# Altium PCB GEM_HV_channel.PcbDoc (part 1 of 3)
Units mm, origin at the board's own origin, x right, y up, seen from the top; angles counter-clockwise.
Board outline 124.5 x 38 mm, 4 copper layers (Top Layer, Layer 1, Layer 2, Bottom Layer), stack 1.441 mm thick; 166 components, 114 nets, 518 pads, 164 vias.
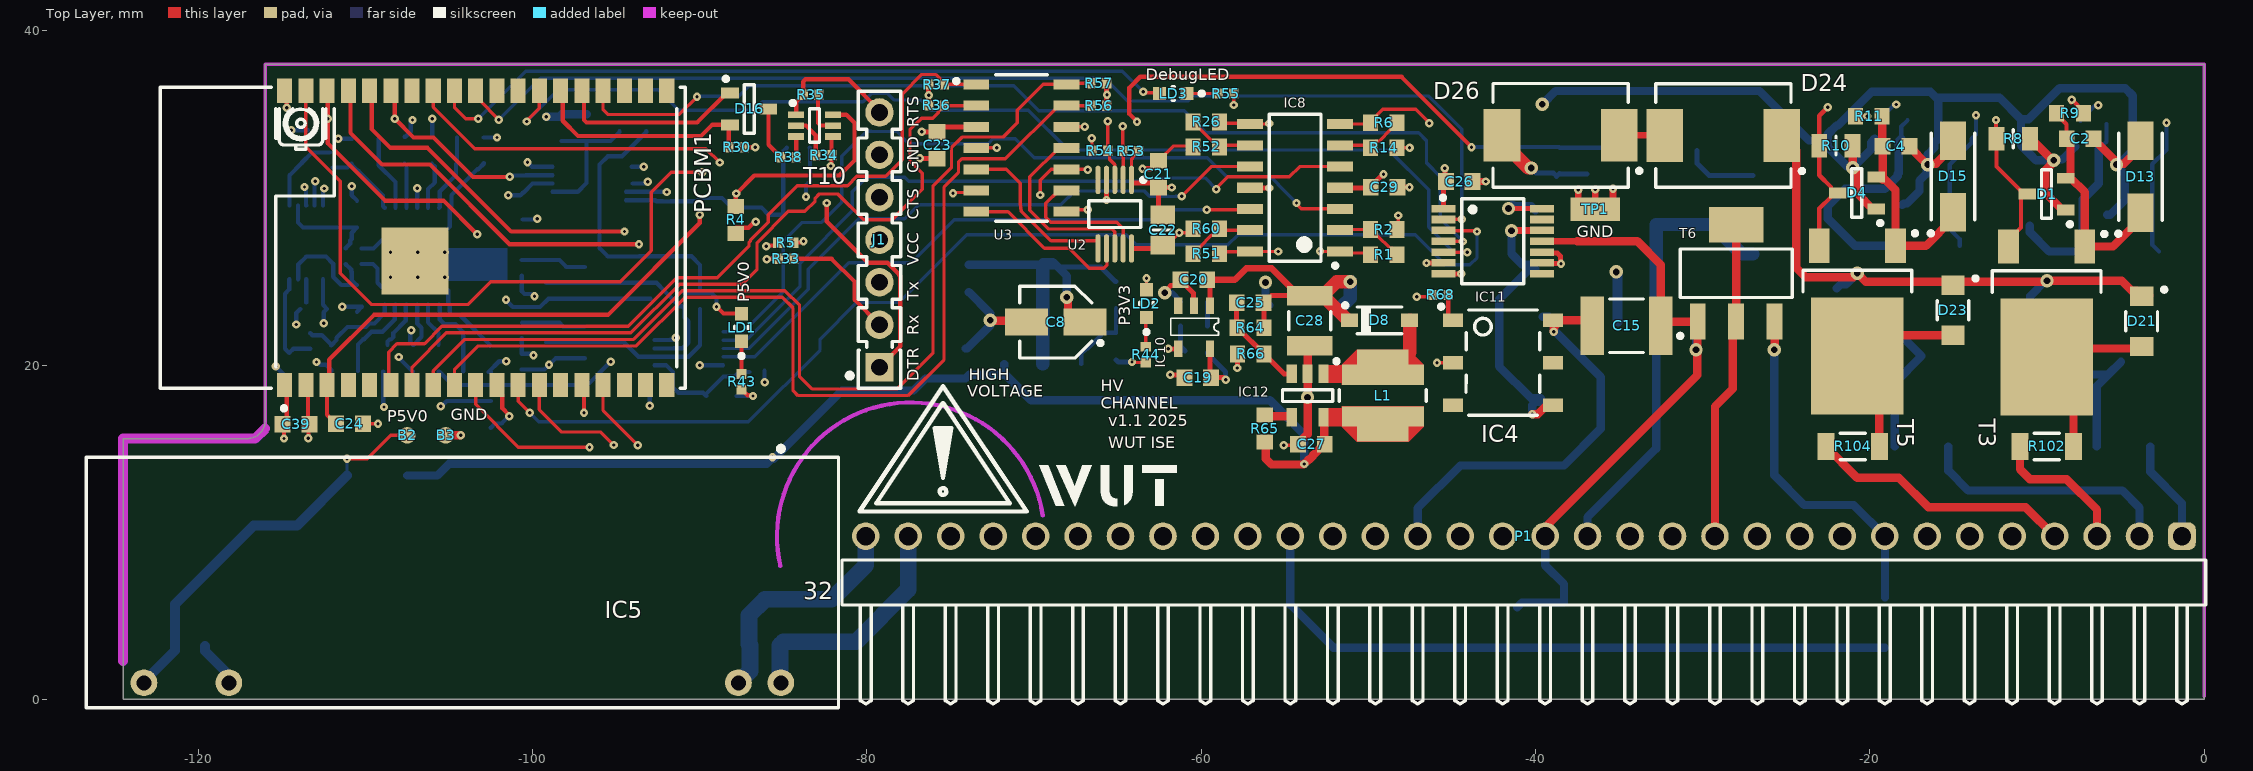
[diagram p0: Top Layer view]
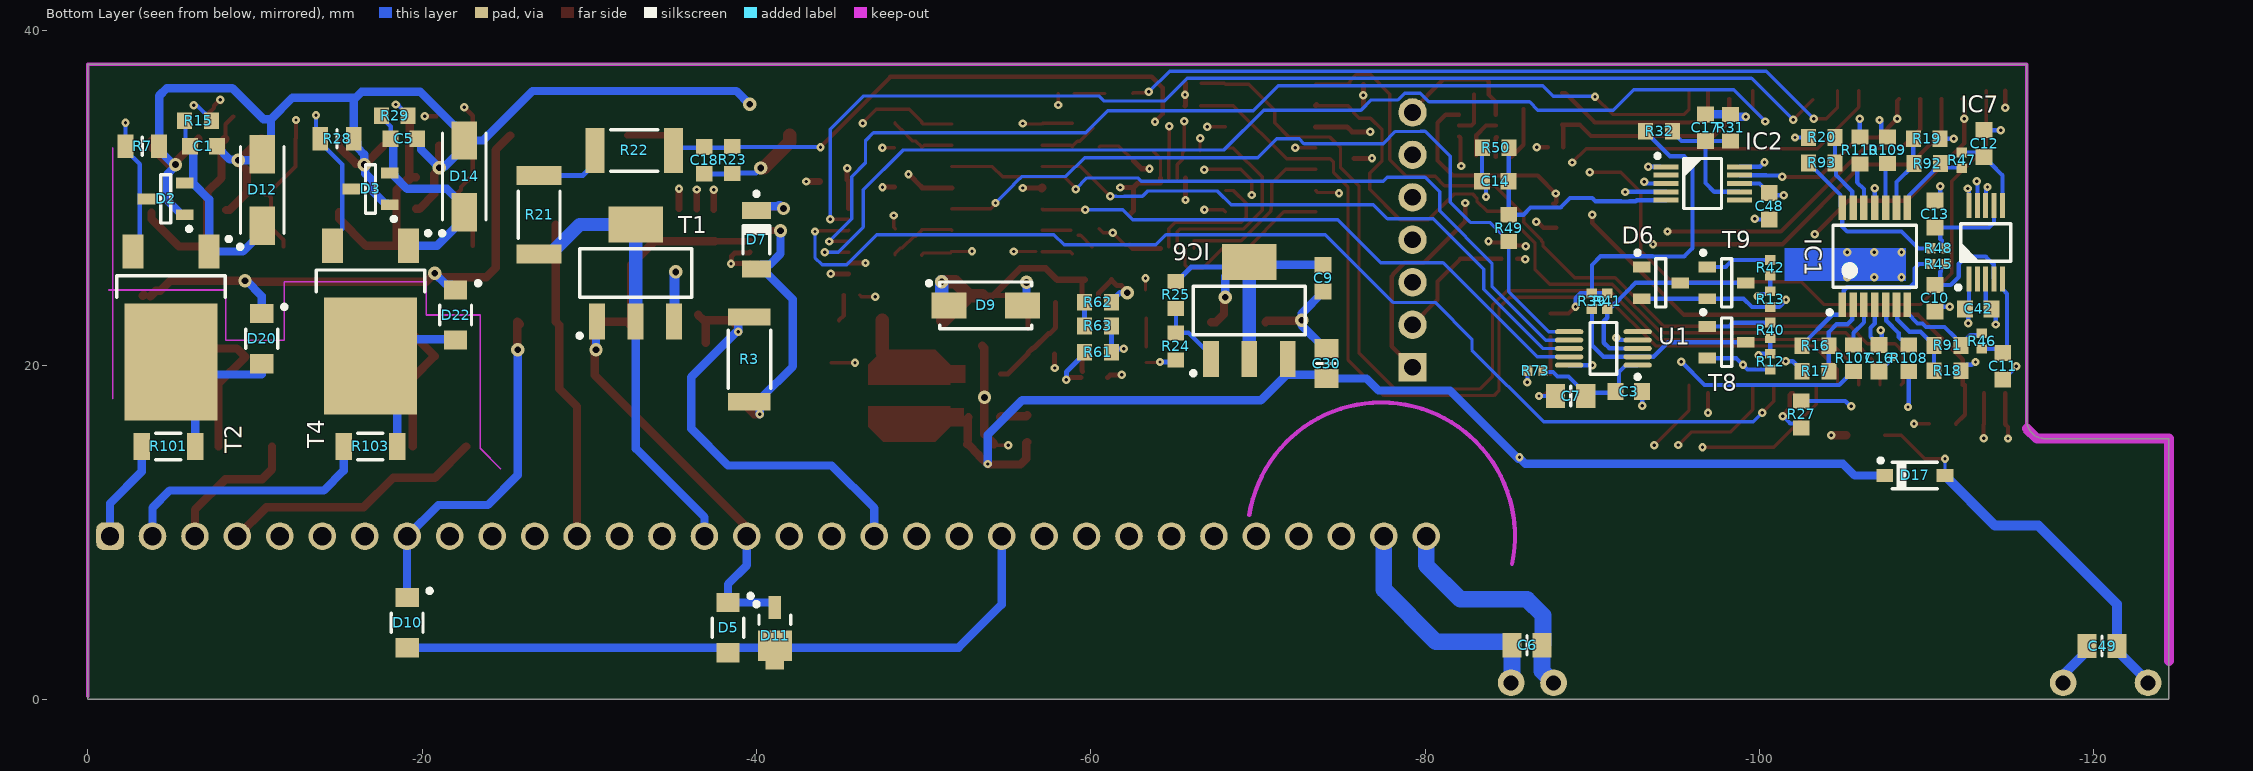
[diagram p1: Bottom Layer view, seen from below]
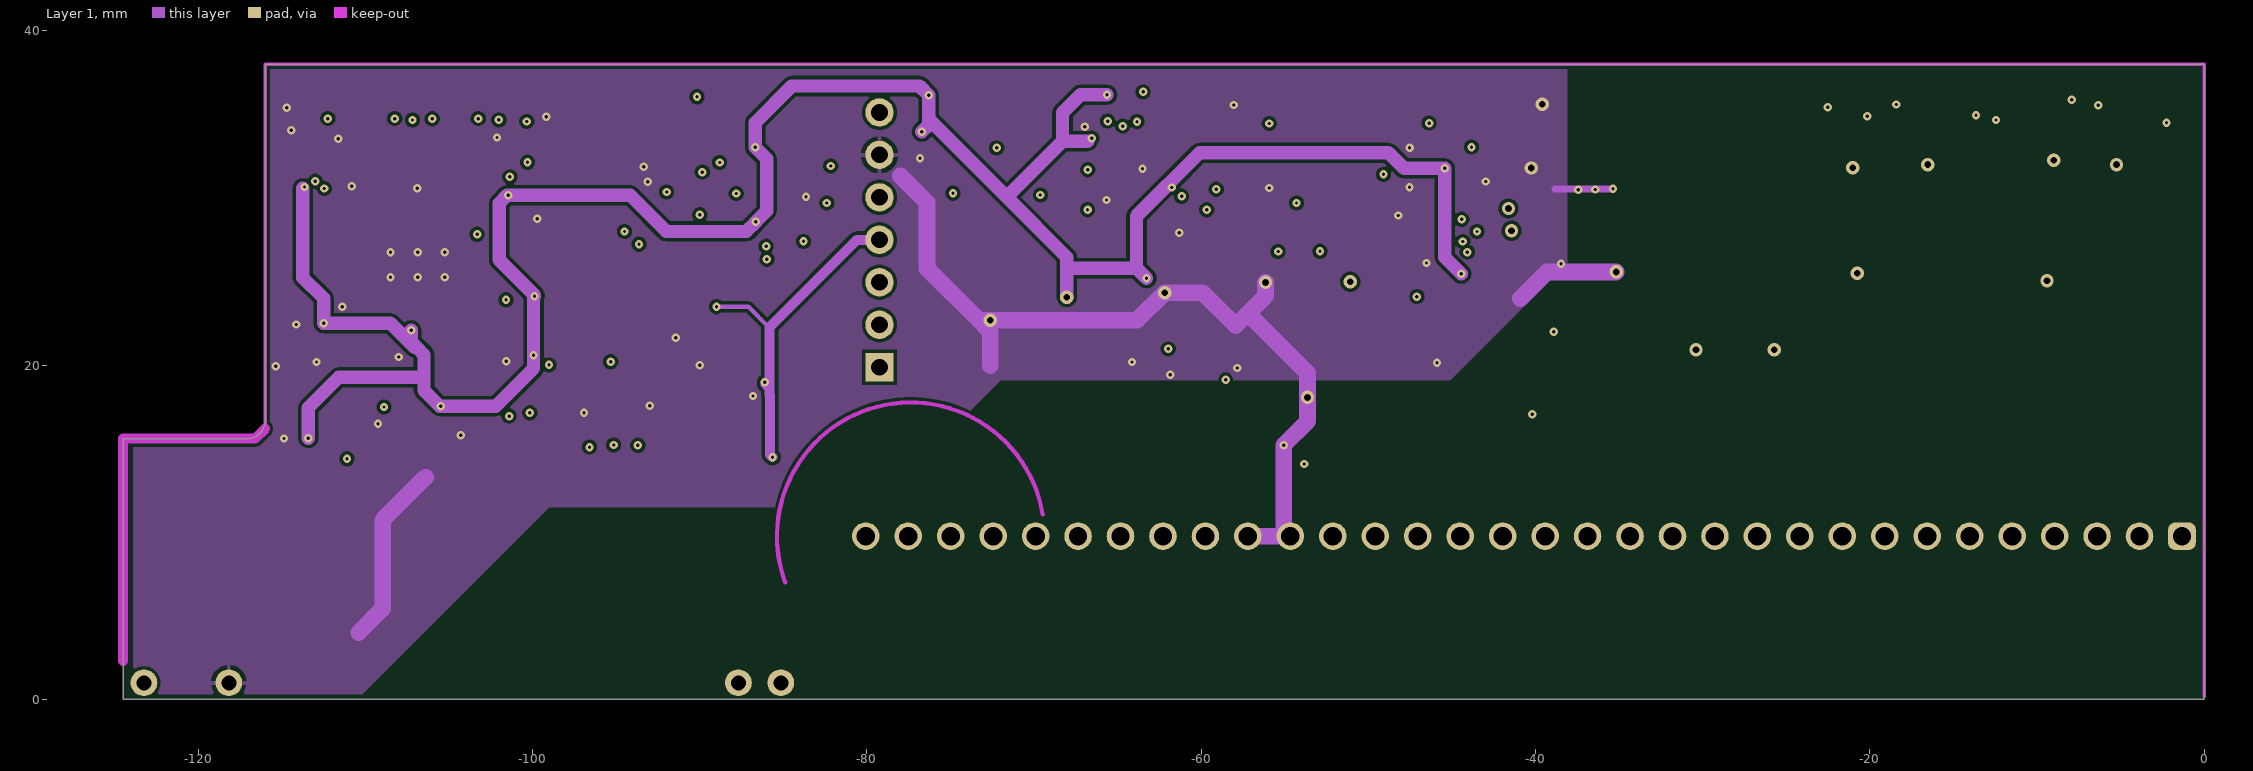
[diagram p2: Layer 1]
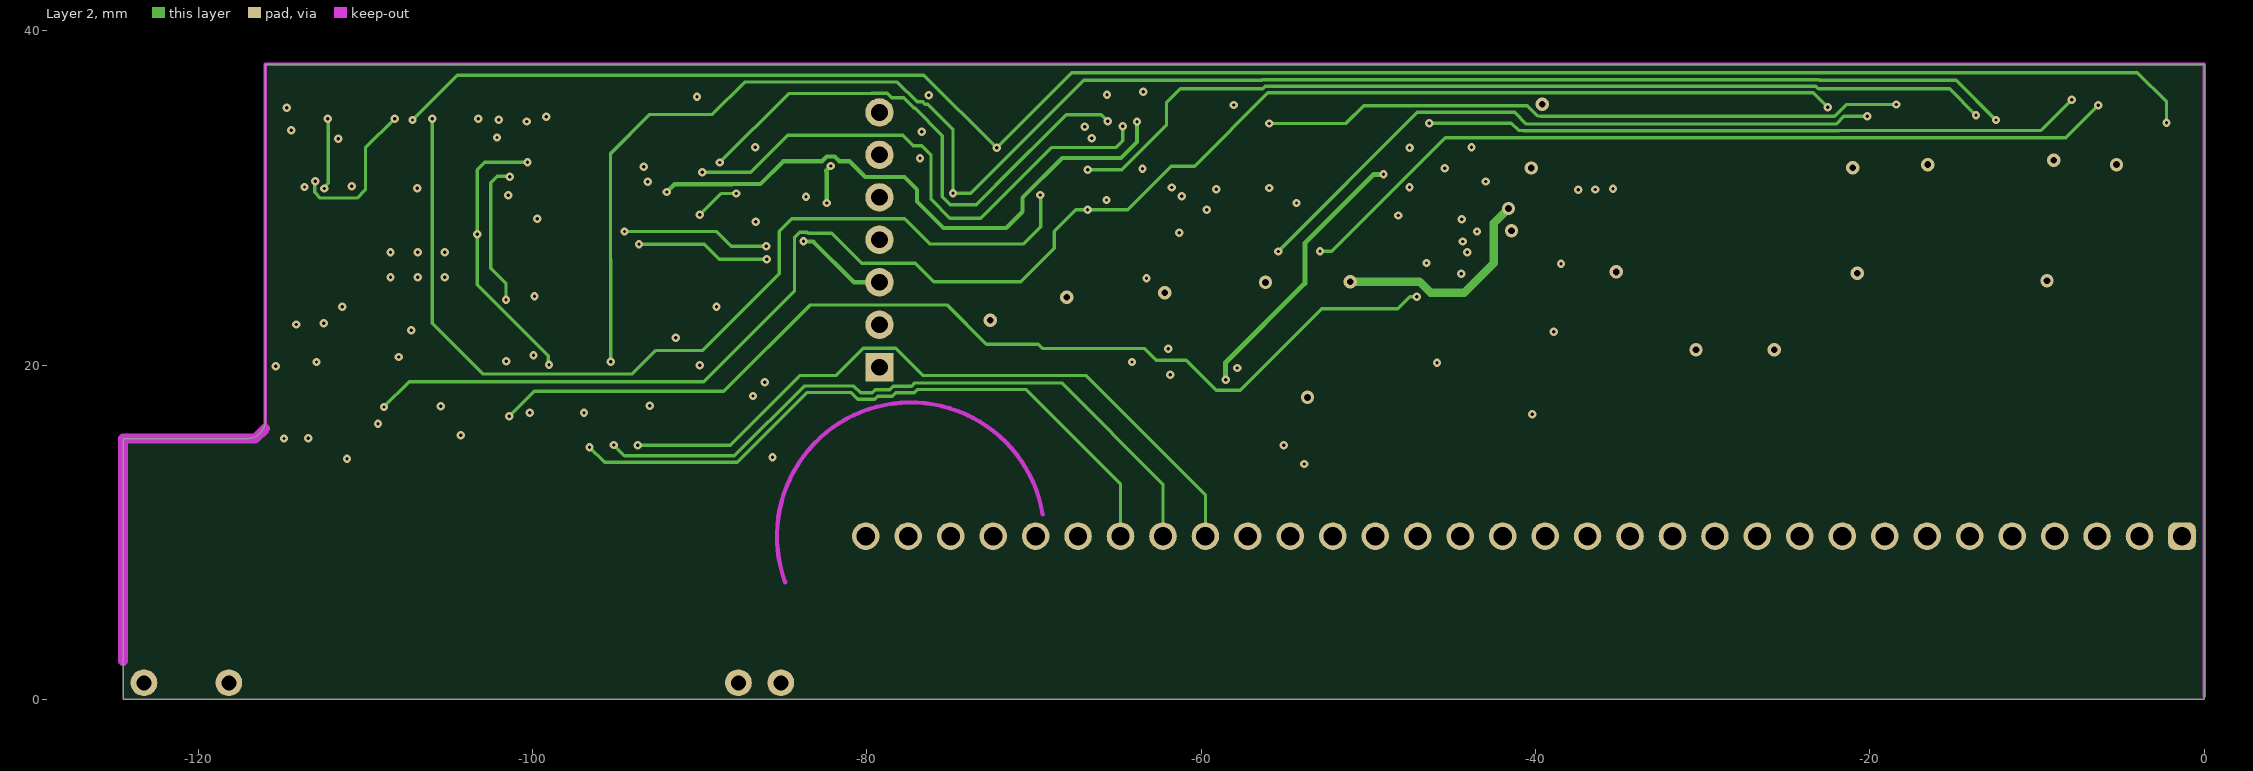
[diagram p3: Layer 2]
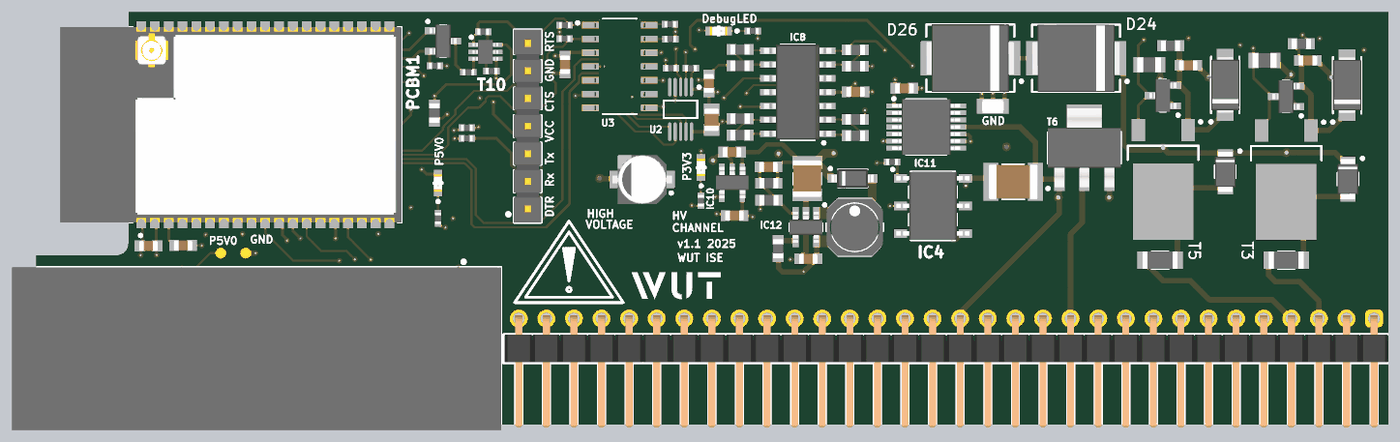
[diagram p5: 3D render of the assembled board from above, using the file's embedded part models]
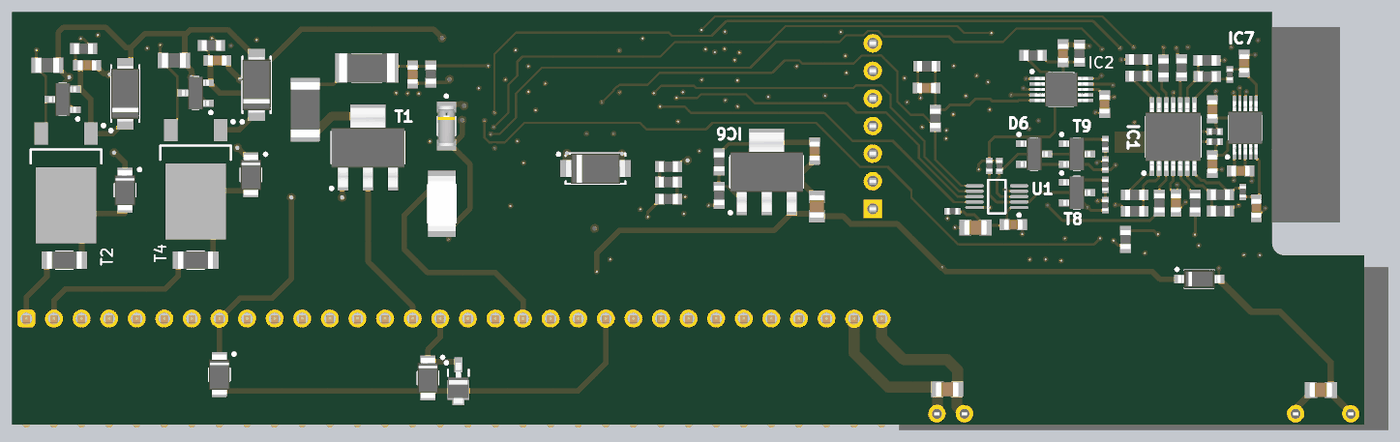
[diagram p6: 3D render of the assembled board from below, using the file's embedded part models]

## Layer stack, top to bottom
Top Solder: solder mask 0.0102, Solder Resist, Dk 3.5
Top Layer: signal copper 0.0356
Dielectric 2: prepreg 0.3, PP-006, Dk 4.1
Layer 1: signal copper 0.035
Dielectric 1: dielectric 0.7, FR-4, Dk 4.8
Layer 2: signal copper 0.035
Dielectric 3: prepreg 0.3, PP-006, Dk 4.1
Bottom Layer: signal copper 0.0356
Bottom Solder: solder mask 0.0102, Solder Resist, Dk 3.5

## Board outline
-124.5,0 -124.5,15.6 -117.1,15.6 ccw(c-117.1,16.7) -116,16.7 -116,38 0,38 0,0

## Design rules (kind name [scope] priority, off if disabled: settings)
Clearance Clearance_HV2 [InNet('DIV_OUT')] p1: gap=1 ignorepadtopadclearanceinfootprint=FALSE
Clearance Clearance_HV [InNetClass('HV1') vs InNetClass('HV2')] p2: gap=1 ignorepadtopadclearanceinfootprint=FALSE
Clearance Clearance_1 [All] p3: gap=0.19 ignorepadtopadclearanceinfootprint=FALSE
MinimumSolderMaskSliver [All] p1: minsoldermaskwidth=0.1
PlaneClearance [All] p1: clearance=1
PlaneConnect [All] p1: pad.planeconnectstyle=Relief pad.reliefexpansion=0.508 pad.reliefentries=4 pad.reliefconductorwidth=0.254 pad.reliefairgap=0.254 via.planeconnectstyle=Direct via.reliefexpansion=0.508 via.reliefentries=4 via.reliefconductorwidth=0.254 via.reliefairgap=0.254
PolygonConnect [All] p1: thpad.connectstyle=Relief thpad.reliefconductorwidth=0.254 thpad.reliefentries=4 thpad.polygonreliefangle="90 Angle" thpad.airgapwidth=0.254 smdpad.connectstyle=Direct smdpad.reliefconductorwidth=0.254 smdpad.reliefentries=4 smdpad.polygonreliefangle="90 Angle" smdpad.airgapwidth=0.254 via.connectstyle=Direct via.reliefconductorwidth=0.254 via.reliefentries=4 via.polygonreliefangle="90 Angle" via.airgapwidth=0.254
RoomDefinition GEM_HV_channel [InComponentClass('GEM_HV_channel')] p1: confinementstyle=ConfineIn formatcopy=TRUE lockcomponents=FALSE outline -116,-61 -2,-61 -2,-37 -116,-37
RoutingVias [All] p1: holewidth=0.711 width=1.27 viastyle="Through Hole" minholewidth=0.2 minwidth=0.5 maxholewidth=0.711 maxwidth=1.27
SilkToSilkClearance [All] p1: silktosilkclearance=0.1
SilkToSolderMaskClearance [IsPad] p1: minsilkscreentomaskgap=0.1 clearancetoexposedcopper=TRUE
SolderMaskExpansion SolderMaskExpansion_via [isvia] p1: expansion=0.102 istentingtop=TRUE
SolderMaskExpansion [All] p2: expansion=0.03 istentingtop=FALSE
Width [All] p1: maxlimit=1 minlimit=0.2 preferedwidth=0.254
25 further rules are at their usual default settings.

## Classes and differential pairs
net class HV2: DIV_IN GND_HV HVQN_C
net class HV1: DIV_OUT HVQP_C HVQP_E

## Components (designator, comment, footprint, x,y, rotation, side; value= is the part's Value field where it differs from the comment)
B2 "SMD Pad" C100 -107.5,15.8 r90 top
B3 "SMD Pad" C100 -105.2,15.8 r90 top
C1 "100nF" CAPC1608X87N -6.921,33.102 r0 bottom
C2 "100nF" CAPC1608X87N -7.424,33.547 r180 top
C3 "100nF" CAPC1608X87N -92.183,18.422 r0 bottom
C4 "100nF" CAPC1608X87N -18.438,33.092 r180 top
C5 "100nF" CAPC1608X87N -18.909,33.547 r0 bottom
C6 "22uF" CAPC2012X145N -86.1,3.25 r0 bottom
C7 "22uF" CAPC2012X145N -88.707,18.154 r180 bottom
C8 "10uF" CAPAE430X540N -68.707,22.578 r180 top
C9 "100nF" CAPC1608X87N -73.9,25.2 r90 bottom
C10 "100nF" CAPC1608X87N -110.5,24 r90 bottom
C11 "100nF" CAPC1608X87N -114.563,19.933 r90 bottom
C12 "100nF" CAPC1608X87N -113.438,33.258 r270 bottom
C13 "100nF" CAPC1608X87N -110.5,29.042 r270 bottom
C14 "100nF" CAPC1608X87N -84.2,31 r180 bottom
C15 "100nF" CAPC4532X185N -34.552,22.358 r180 top
C16 "100nF" CAPC1608X87N -107.155,20.417 r90 bottom
C17 "100nF" CAPC1608X87N -96.77,34.204 r270 bottom
C18 "100nF" CAPC1608X87N -36.885,32.25 r90 bottom
C19 "2.2uF" CAPC1608X87N -60.211,19.251 r0 top
C20 "2.2uF" CAPC1608X87N -60.44,25.11 r0 top
C21 "100nF" CAPC1608X87N -62.558,31.426 r270 top
C22 "22uF" CAPC2012X145N -62.309,28.082 r90 top
C23 "100nF" CAPC1608X87N -75.806,33.151 r90 top
C24 "1uF" CAPC1608X87N -110.957,16.5 r180 top
C25 "82pF" CAPC1608X87N -57.079,23.737 r0 top
C26 "100nF" CAPC1608X87N -44.568,30.984 r180 top
C27 "2.2uF" CAPC1608X87N -53.412,15.276 r0 top
C28 "4.7uF" CAPC3225X270N -53.508,22.656 r90 top
C29 "100nF" CAPC1608X87N -49.061,30.65 r180 top
C30 "22uF" CAPC2012X145N -74.1,20.1 r270 bottom
C39 "100nF" CAPC1608X87N -114.155,16.463 r0 top
C42 "100nF" CAPC1608X87N -113.096,23.366 r0 bottom
C48 "100nF" CAPC1608X87N -100.587,29.51 r90 bottom
C49 "22uF" CAPC2012X145N -120.5,3.2 r180 bottom
D1 "BAV199" SOT95P240X110-3N -9.434,30.231 r180 top
D2 "BAV199" SOT95P240X110-3N -4.662,29.951 r0 bottom
D3 "BAV199" SOT95P240X110-3N -16.909,30.547 r0 bottom
D4 "BAV199" SOT95P240X110-3N -20.781,30.301 r180 top
D5 "RS1MWF" SOD-123F -38.3,4.3 r270 bottom
D6 "BAT54C" SOT95P240X130-3N -94.104,24.926 r180 bottom
D7 "PMLL4148L" DIOMELF3515N -40,27.5 r270 bottom
D8 "MBR0540T1G" SOD3716X135N -49.337,22.678 r0 top
D9 "BZG03C36" DIOM5326X230N -53.722,23.578 r180 bottom
D10 "RS1MWF" SOD-123F -19.1,4.6 r270 bottom
D11 "SM2T3V3A" DO-216AA -41.1,4 r90 bottom
D12 "SMAJ5.0A" DIOM5226X262N -10.436,30.481 r90 bottom
D13 "SMAJ5.0A" DIOM5226X262N -3.812,31.265 r90 top
D14 "SMAJ5.0A" DIOM5226X262N -22.522,31.289 r90 bottom
D15 "SMAJ5.0A" DIOM5226X262N -15.03,31.288 r90 top
D16 "BAT54C" SOT95P240X130-3N -87.04,35.328 r0 top
D17 "MBR0540T1G" SOD3716X135N -109.3,13.4 r180 bottom
D20 "RS1MWF" SOD-123F -10.405,21.588 r270 bottom
D21 "RS1MWF" SOD-123F -3.745,22.622 r270 top
D22 "RS1MWF" SOD-123F -22,23 r270 bottom
D23 "RS1MWF" SOD-123F -15.03,23.288 r270 top
D24 "1.5SMC480A" DIOM7959X262N -28.769,33.737 r180 top
D26 "1.5SMC480A" DIOM7959X262N -38.5,33.75 r180 top
IC1 "LMV324IPT" SOP65P640X110-14N -106.901,26.513 r90 bottom
IC2 "ADS1115IDGST" SOP50P490X110-10N -96.608,30.868 r180 bottom
IC4 "AQV224NS" PANASONIC_AQV22(SOP) -41.947,20.153 r0 top
IC5 "RHV3-0505S/R20" DCDC_RECOM_RHV3_Single -104.2,1 r180 top
IC6 "LD1117STR" SOT230P700X180-4N -69.485,23.268 r90 bottom
IC7 "ADS1115IDGST" SOP50P490X110-10N -113.54,27.345 r90 bottom
IC8 "LM324M/NOPB" SOIC127P600X175-14N -54.388,30.613 r180 top
IC10 "NCV8187AMLEADJTCG" SOT23-5 -60.431,22.27 r270 top
IC11 "MCP41HV51T-104E" SOP65P640X120-14N -42.565,27.415 r0 top
IC12 "LM2733YMF" SOT95P284X122-5N -53.637,18.178 r270 top
J1 "Header 7" SAMTEC_TSW-107-07-L-S-LL -79.25,19.88 r90 top
L1 "10uH" IND_TDK_VLCF5020-1 -49.137,18.178 r90 top
LD1 "Green" LED_KINGBRIGHT_KP-1608CGCK -87.5,22.25 r90 top
LD2 "Green" LED_KINGBRIGHT_KP-1608CGCK -63.276,23.68 r90 top
LD3 "Green" LED_KINGBRIGHT_KP-1608CGCK -61.675,36.25 r180 top
P1 "61303211021" 61303211021 -40.7,7 r0 top locked
PCBM1 "ESP32-WROVER-I" PCBM_ESP32-WROVER-I -106.574,27.618 r90 top
R1 "10k" RESC1608X55N -49.086,26.613 r180 top
R2 "10k" RESC1608X55N -49.086,28.113 r180 top
R3 "Undefined" RES_VISHAY_CRHV2010A -39.581,20.353 r90 bottom
R4 "10k" RESC1608X55N -87.84,28.689 r90 top
R5 "220" RESC1005X40N -84.849,27.333 r180 top
R6 "10k" RESC1608X55N -49.086,34.51 r180 top
R7 "5k6" RESC2012X60N -3.255,33.102 r0 bottom
R8 "5k6" RESC2012X60N -11.424,33.547 r180 top
R9 "100" RESC1608X55N -8.029,35.07 r0 top
R10 "5k6" RESC2012X60N -22.03,33.138 r180 top
R11 "100" RESC1608X55N -20.067,34.898 r180 top
R12 "1k" RESC1005X40N -100.645,20.208 r90 bottom
R13 "1k" RESC1005X40N -100.645,23.949 r90 bottom
R14 "10k" RESC1608X55N -49.086,33.01 r180 top
R15 "100" RESC1608X55N -6.594,34.629 r180 bottom
R16 "15k" RESC1608X55N -103.354,21.164 r0 bottom
R17 "10k" RESC1608X55N -103.354,19.64 r180 bottom
R18 "10k" RESC1608X55N -111.248,19.658 r0 bottom
R19 "10k" RESC1608X55N -110.011,33.538 r0 bottom
R20 "10k" RESC1608X55N -103.724,33.625 r180 bottom
R21 "10M" RESC5025X65N -27,29 r90 bottom
R22 "10M" RESC5025X65N -32.687,32.844 r180 bottom
R23 "15k" RESC1608X55N -38.56,32.275 r90 bottom
R24 "360" RESC1608X55N -65.093,21.122 r90 bottom
R25 "220" RESC1608X55N -65.093,24.2 r90 bottom
R26 "10k" RESC1608X55N -59.705,34.552 r0 top
R27 "10k" RESC1608X55N -102.5,17.05 r270 bottom
R28 "5k6" RESC2012X60N -14.909,33.547 r0 bottom
R29 "100" RESC1608X55N -18.363,34.927 r180 bottom
R30 "1k" RESC1005X40N -87.802,33.042 r0 top
R31 "10k" RESC1608X55N -98.27,34.204 r270 bottom
R32 "10k" RESC1608X55N -94,34 r180 bottom
R33 "220" RESC1005X40N -84.849,26.359 r180 top
R34 "1k" RESC1005X40N -82.588,32.553 r180 top
R35 "1k" RESC1005X40N -83.349,36.187 r0 top
R36 "1k" RESC1005X40N -75.851,35.534 r180 top
R37 "1k" RESC1005X40N -75.837,36.79 r180 top
R38 "220" RESC1005X40N -84.702,32.448 r180 top
R39 "10k" RESC1005X40N -89.981,23.835 r90 bottom
R40 "10k" RESC1005X40N -100.645,22.078 r270 bottom
R41 "10k" RESC1005X40N -90.902,23.835 r90 bottom
R42 "10k" RESC1005X40N -100.645,25.82 r270 bottom
R43 "3k3" RESC1005X40N -87.5,19 r90 top
R44 "1k" RESC1005X40N -63.312,20.628 r90 top
R45 "1k" RESC1005X40N -110.71,26.052 r180 bottom
R46 "1k" RESC1005X40N -113.302,21.446 r270 bottom
R47 "1k" RESC1005X40N -112.11,32.251 r90 bottom
R48 "1k" RESC1005X40N -110.712,26.985 r180 bottom
R49 "10k" RESC1608X55N -85,28.2 r90 bottom
R50 "10k" RESC1608X55N -84.225,33 r180 bottom
R51 "10k" RESC1608X55N -59.695,26.666 r0 top
R52 "10k" RESC1608X55N -59.705,33.052 r0 top
R53 "1k" RESC1005X40N -64.219,32.811 r0 top
R54 "1k" RESC1005X40N -66.067,32.826 r180 top
R55 "1k" RESC1005X40N -58.53,36.25 r0 top
R56 "1k" RESC1005X40N -66.119,35.515 r0 top
R57 "1k" RESC1005X40N -66.133,36.873 r0 top
R60 "10k" RESC1608X55N -59.695,28.166 r0 top
R61 "510k" RESC1608X55N -60.431,20.77 r0 bottom
R62 "18k" RESC1608X55N -60.431,23.77 r0 bottom
R63 "18k" RESC1608X55N -60.429,22.346 r180 bottom
R64 "510k" RESC1608X55N -57.054,22.237 r0 top
R65 "18k" RESC1608X55N -56.201,16.208 r270 top
R66 "18k" RESC1608X55N -57.04,20.674 r0 top
R68 "330" RESC1005X40N -45.7,24.2 r0 top
R73 "10" RESC1005X40N -86.592,19.664 r180 bottom
R91 "15k" RESC1608X55N -111.248,21.182 r180 bottom
R92 "15k" RESC1608X55N -110.035,32.061 r180 bottom
R93 "15k" RESC1608X55N -103.724,32.101 r0 bottom
R101 "50k" RES_SEI_HVC1206 -4.825,15.138 r0 bottom
R102 "50k" RES_SEI_HVC1206 -9.424,15.138 r180 top
R103 "50k" RES_SEI_HVC1206 -16.909,15.138 r0 bottom
R104 "50k" RES_SEI_HVC1206 -21.03,15.138 r180 top
R107 "6k8" RESC1608X55N -105.631,20.417 r90 bottom
R108 "6k8" RESC1608X55N -108.929,20.417 r90 bottom
R109 "6k8" RESC1608X55N -107.663,32.863 r270 bottom
R110 "6k8" RESC1608X55N -106.014,32.844 r270 bottom
T1 "PBHV8560ZX" SOT230P700X180-4N -32.773,25.514 r90 bottom
T2 "IXTY01N100" TO228P991X238-3N-R648X546 -4.98,22.247 r270 bottom
T3 "IXTY01N100" TO228P991X238-3N-R648X546 -9.424,22.547 r270 top
T4 "IXTY01N100" TO228P991X238-3N-R648X546 -16.909,22.597 r270 bottom
T5 "IXTY01N100" TO228P991X238-3N-R648X546 -20.75,22.588 r270 top
T6 "STN9360" SOT230P700X180-4N -28,25.5 r90 top
T8 "BSS138LT1G" SOT95P240X110-3N -98.037,21.37 r180 bottom
T9 "BSS138LT1G" SOT95P240X110-3N -98.037,24.926 r180 bottom
T10 "BC847BS" SOT65P210X110-6N -83.134,34.331 r0 top
TP1 "" TYCO_RCT-0C -36.432,29.323 r0 top
U1 "MCP4728-E/UN" MSOP-UN10_N -90.665,21 r0 bottom
U2 "MCP4728-E/UN" MSOP-UN10_N -65.172,29.033 r270 top
U3 "LMV339IDR" FP-D0014A-MFG -70.76,32.989 r0 top

## Footprints (in the part's own frame and the unit in brackets; to place one, negate y for a bottom-side part, rotate by r counter-clockwise, add the part's x,y. Pads: shape width x height; smd on the part's side, far side on the other; paste and mask are expansions set on the pad)
61303211021 [mm] "Pin Header, pitch 2.54 mm, THT, Angled, single row, 32p"
  rrect50% 1.65x1.65 hole 1.1: 1(39.37,2.77)
  round 1.65 hole 1.1: 2(36.83,2.77) 3(34.29,2.77) 4(31.75,2.77) 5(29.21,2.77) 6(26.67,2.77) 7(24.13,2.77) 8(21.59,2.77) 9(19.05,2.77) 10(16.51,2.77) 11(13.97,2.77) 12(11.43,2.77) 13(8.89,2.77) 14(6.35,2.77) 15(3.81,2.77) 16(1.27,2.77) 17(-1.27,2.77) 18(-3.81,2.77) 19(-6.35,2.77) 20(-8.89,2.77) 21(-11.43,2.77) 22(-13.97,2.77) 23(-16.51,2.77) 24(-19.05,2.77) 25(-21.59,2.77) 26(-24.13,2.77) 27(-26.67,2.77) 28(-29.21,2.77) 29(-31.75,2.77) 30(-34.29,2.77) 31(-36.83,2.77) 32(-39.37,2.77)
  silkscreen extent -40.79,-7.27 40.79,1.35, body extent -40.64,-7.27 40.64,3.09, height 2.58
C100 [mm] "1mm Diameter SMD Pad"
  round 1 smd paste-1: 1(0,0)
CAPAE430X540N [mm] "Capacitor, Aluminium Electrolytric, 4.3mm L X 4.3mm W X 5.4mm H, IPC Medium Density"
  rect 2.55x1.6 smd: 1(-1.75,0) 2(1.75,0)
  silkscreen extent -2.8,-2.15 2.15,2.15, body extent -2.75,-2.25 2.75,2.25, height 5.7
CAPC1608X87N [mm] "Chip Capacitor, Body 1.6x0.8mm IPC Medium Density"
  rect 0.95x1 smd: 1(-0.8,0) 2(0.8,0)
  body extent -0.87,-0.47 0.88,0.48, height 0.87
CAPC2012X145N [mm] "Chip Capacitor, Body 2.0x1.45mm, IPC Medium Density"
  rect 1.15x1.45 smd: 1(-0.9,0) 2(0.9,0)
  silkscreen extent 0,-0.57 0,0.57, body extent -1.05,-0.67 1.05,0.68, height 1.45
CAPC3225X270N [mm] "Chip Capacitor, Body 3.2x2.5mm, IPC Medium Density"
  rect 1.15x2.7 smd: 1(-1.5,0) 2(1.5,0)
  silkscreen extent -0.55,-1.25 0.55,1.25, body extent -1.7,-1.35 1.7,1.35, height 2.7
CAPC4532X185N [mm] "Chip Capacitor, 2-Leads, Body 4.5x3.2mm, IPC Medium Density"
  rect 1.4x3.5 smd: 1(-2.05,0) 2(2.05,0)
  silkscreen extent -1,-1.6 1,1.6, body extent -2.25,-1.6 2.25,1.6, height 1.85
DCDC_RECOM_RHV3_Single [mm] "RHV3 Series , Body 45x15mm"
  round 1.6 hole 0.9: 1(-19.05,0) 2(-16.51,0) 14(13.97,0) 16(19.05,0)
  silkscreen extent -22.5,-14.15 22.5,1.5, body extent -22.5,-13.5 22.5,1.5, height 17
DIOM5226X262N [mm] "DO-214-AC/SMA Diode, Molded Body; 5.21mm L X 2.605mm W X 2.62mm H, IPC Medium Density"
  rect 2.3x1.55 smd: 1(-2.15,0) 2(2.15,0)
  silkscreen extent -3.52,-1.3 2.6,1.45, body extent -2.6,-1.3 2.6,1.31, height 2.62
DIOM5326X230N [mm] "DO-214-AC/SMA Molded Diode, Body 5.3x2.6mm, IPC Medium Density"
  rect 2.1x1.55 smd: 1(-2.2,0) 2(2.2,0)
  silkscreen extent -3.53,-1.4 2.75,1.45, body extent -2.75,-1.4 2.75,1.4, height 2.3
DIOM7959X262N [mm] "DO-214-AB/SMC Molded Diode, Body 7.9x5.9mm, IPC Medium Density"
  rect 2.2x3.15 smd: 1(-3.5,0) 2(3.5,0)
  silkscreen extent -4.83,-3.1 4.05,3.1, body extent -4.06,-3.11 4.07,3.11, height 2.62
DIOMELF3515N [mm] "SOD80C, MELF Diode, 2-Leads, Body 3.5x1.5mm, IPC Medium Density"
  rect 1x1.75 smd: 1(-1.75,0) 2(1.75,0)
  silkscreen extent -2.87,-0.8 0.85,0.8, body extent -1.85,-0.8 1.85,0.8, height 1.6
DO-216AA [mm] "DO-216-AA/SMB Molded Diode, Body 1.9x1.9mm, IPC Medium Density"
  rect 1.38x0.75 smd: 1(1.515,0)
  rect 0.6x1.1 smd: 2(-1.905,0)
  rect 1.82x2.03 smd: 2(-0.795,0)
  silkscreen extent 0.5,-0.95 1.82,1.23, body extent -2.06,-0.95 1.69,0.95, height 1.15
FP-D0014A-MFG [mm]
  rect 1.55x0.6 smd paste-1000 mask+0: 1(-2.7,3.81) 2(-2.7,2.54) 3(-2.7,1.27) 4(-2.7,0) 5(-2.7,-1.27) 6(-2.7,-2.54) 7(-2.7,-3.81) 8(2.7,-3.81) 9(2.7,-2.54) 10(2.7,-1.27) 11(2.7,0) 12(2.7,1.27) 13(2.7,2.54) 14(2.7,3.81)
  silkscreen extent -4.02,-4.38 1.55,4.38, body extent -3.57,-4.62 3.57,4.62, height 0.25
IND_TDK_VLCF5020-1 [mm] "SMD Inductor, 5mm L X 5mm W X 2mm H, TDK VLCF5020-1 Case"
  rect 0.9x3.1 smd: 1(-2.3,0) 2(2.3,0)
  rect 1.2x4.9 smd: 1(-1.25,0) 2(1.25,0)
  Top Layer region: -2.75,-1.55 -1.85,-2.45 -0.65,-2.45 -0.65,2.45 -1.85,2.45 -2.75,1.55
  Top Layer region: 2.75,1.55 1.85,2.45 0.65,2.45 0.65,-2.45 1.85,-2.45 2.75,-1.55
  silkscreen extent -0.35,-2.6 0.35,2.6, body extent -2.6,-2.6 2.6,2.6, height 2
LED_KINGBRIGHT_KP-1608CGCK [mm] "SMT Green LED, Case 0603, Body L 1.60mm x W 0.80mm x H 1.10mm"
  rect 0.8x0.8 smd: 1(-0.825,0) 2(0.825,0)
  silkscreen extent -1.82,-0.4 0.08,0.4, body extent -0.8,-0.4 0.8,0.4, height 1.1
MSOP-UN10_N [mm] "TSSOP, 10-Leads, Body 3x3mm, Pitch 0.5mm, IPC Medium Density"
  oval 1.7x0.3 smd: 1(-2.05,1) 2(-2.05,0.5) 3(-2.05,0) 4(-2.05,-0.5) 5(-2.05,-1) 6(2.05,-1) 7(2.05,-0.5) 8(2.05,0) 9(2.05,0.5) 10(2.05,1)
  silkscreen extent -2.17,-1.55 0.8,1.82, body extent -1.55,-1.55 1.55,1.55, height 1.1
PANASONIC_AQV22(SOP) [mm] "PANASONIC_AQV21(SOP) 2.54mm pitch; 6 pin, 4.40mm W X 6.30mm L X 2.20mm H body"
  rect 1.2x0.8 smd: 1(-3,2.54) 2(-3,0) 3(-3,-2.54) 4(3,-2.54) 5(3,0) 6(3,2.54)
  silkscreen extent -3.82,-3.15 2.2,3.47, body extent -3.37,-3.15 3.37,3.15, height 2.1
PCBM_ESP32-WROVER-I [mm] "Generic WiFi-BT-BLE MCU Module (IPEX antenna) ,Body 18.00mm x 31.4mm"
  rect 1.45x0.9 smd: 1(-8.8,8.26) 2(-8.8,6.99) 3(-8.8,5.72) 4(-8.8,4.45) 5(-8.8,3.18) 6(-8.8,1.91) 7(-8.8,0.64) 8(-8.8,-0.63) 9(-8.8,-1.9) 10(-8.8,-3.17) 11(-8.8,-4.44) 12(-8.8,-5.71) 13(-8.8,-6.98) 14(-8.8,-8.25) 15(-8.8,-9.52) 16(-8.8,-10.79) 17(-8.8,-12.06) 18(-8.8,-13.33) 19(-8.8,-14.6) 20(8.8,-14.6) 21(8.8,-13.33) 22(8.8,-12.06) 23(8.8,-10.79) 24(8.8,-9.52) 25(8.8,-8.25) 26(8.8,-6.98) 27(8.8,-5.71) 28(8.8,-4.44) 29(8.8,-3.17) 30(8.8,-1.9) 31(8.8,-0.63) 32(8.8,0.64) 33(8.8,1.91) 34(8.8,3.18) 35(8.8,4.45) 36(8.8,5.72) 37(8.8,6.99) 38(8.8,8.26)
  rect 4x4 smd: 39(-1.38,0.47)
  silkscreen extent -10.32,-15.7 9,15.7, body extent -9,-15.7 9,15.7, height 3.64
RES_SEI_HVC1206 [mm] "Chip Resistor, EIA 1206, Metric 3216, Body 3.2x1.6mm"
  rect 1x1.6 smd: 1(-1.6,0) 2(1.6,0)
  silkscreen extent -0.75,-0.8 0.75,0.8, body extent -1.6,-0.8 1.6,0.8, height 0.76
RES_VISHAY_CRHV2010A [mm] "EIA 2010, Metric 5125, High Voltage Thick Film Chip Resistor, 5.08mm L X 2.54mm W X 0.69mm H"
  rect 1.02x2.54 smd: 1(-2.54,0) 2(2.54,0)
  silkscreen extent -1.73,-1.27 1.73,1.27, body extent -2.54,-1.27 2.54,1.27, height 0.69
RESC1005X40N [mm] "Chip Resistor, EIA 0402, Metric 1005, Body 1.0x0.5mm, IPC Medium Density"
  rect 0.58x0.62 smd: 1(-0.47,0) 2(0.47,0)
  body extent -0.52,-0.27 0.53,0.28, height 0.4
RESC1608X55N [mm] "Chip Resistor, EIA 0603, Metric 1608, Body 1.6x0.8mm, IPC Medium Density"
  rect 0.9x1 smd: 1(-0.8,0) 2(0.8,0)
  body extent -0.87,-0.47 0.88,0.48, height 0.55
RESC2012X60N [mm] "Chip Resistor, EIA 0805, Metric 2012, Body 2.0x1.2mm, IPC Medium Density"
  rect 0.95x1.4 smd: 1(-1,0) 2(1,0)
  silkscreen extent 0,-0.55 0,0.55, body extent -1.1,-0.67 1.1,0.68, height 0.6
RESC5025X65N [mm] "Resistor, Chip; 5mm L X 2.5mm W X 0.65mm H, IPC Medium Density"
  rect 1.15x2.7 smd: 1(-2.35,0) 2(2.35,0)
  silkscreen extent -1.4,-1.25 1.4,1.25, body extent -2.55,-1.32 2.55,1.33, height 0.65
SAMTEC_TSW-107-07-L-S-LL [mm] "7 Contacts - Pitch 2.54mm - Single Row  Through Mount Straigh Header (Post Lead 5.84mm, Tail Lead 2.54mm, Insulator 2.54mm)"
  rect 1.7x1.7 hole 1: 1(0,0)
  round 1.7 hole 1: 2(2.54,0) 3(5.08,0) 4(7.62,0) 5(10.16,0) 6(12.7,0) 7(15.24,0)
  silkscreen extent -1.27,-1.27 16.51,1.93, body extent -1.27,-1.27 16.51,1.27, height 8.38
SOD3716X135N [mm] "SOD Diode (SOD-123), 2.70mm W X 1.60mm L X 1.35mm H body, IPC Medium Density"
  rect 1x0.8 smd: 1(-1.8,0) 2(1.8,0)
  silkscreen extent -2.17,-0.8 1.35,1.02, body extent -1.95,-0.85 1.95,0.85, height 1.35
SOD-123F [mm] "Small Outline Diode Flat Lead (SOD-123F), Body; 2.70mm L X 1.8mm W X 1.15mm H"
  rect 1.15x1.4 smd: 1(-1.5,0) 2(1.5,0)
  silkscreen extent -2.02,-0.95 0.58,1.47, body extent -1.85,-0.95 1.85,0.95, height 1.15
SOIC127P600X175-14N [mm] "SOIC 14, Pitch 1.27mm - Body 4x8.75mm, IPC Medium Density"
  rect 1.55x0.6 smd: 1(-2.7,3.81) 2(-2.7,2.54) 3(-2.7,1.27) 4(-2.7,0) 5(-2.7,-1.27) 6(-2.7,-2.54) 7(-2.7,-3.81) 8(2.7,-3.81) 9(2.7,-2.54) 10(2.7,-1.27) 11(2.7,0) 12(2.7,1.27) 13(2.7,2.54) 14(2.7,3.81)
  silkscreen extent -2.53,-4.4 1.55,4.78, body extent -3.1,-4.37 3.1,4.38, height 1.75
SOP50P490X110-10N [mm] "MSOP, 10-Leads, Body 3.1x3.1mm (max), Pitch 0.50mm, IPC Medium Density"
  rect 1.5x0.3 smd: 1(-2.2,1) 2(-2.2,0.5) 3(-2.2,0) 4(-2.2,-0.5) 5(-2.2,-1) 6(2.2,-1) 7(2.2,-0.5) 8(2.2,0) 9(2.2,0.5) 10(2.2,1)
  silkscreen extent -2.83,-1.5 1.12,1.77, body extent -2.45,-1.55 2.45,1.55, height 1.1
SOP65P640X110-14N [mm] "SOP, 14-Leads, Body 4.4x5mm (max), Pitch 0.65mm, IPC Medium Density"
  rect 1.45x0.45 smd: 1(-2.9,1.95) 2(-2.9,1.3) 3(-2.9,0.65) 4(-2.9,0) 5(-2.9,-0.65) 6(-2.9,-1.3) 7(-2.9,-1.95) 8(2.9,-1.95) 9(2.9,-1.3) 10(2.9,-0.65) 11(2.9,0) 12(2.9,0.65) 13(2.9,1.3) 14(2.9,1.95)
  silkscreen extent -3.47,-2.5 1.85,2.83, body extent -3.12,-2.55 3.12,2.55, height 1.1
SOP65P640X120-14N [mm] "SOP, 14-Leads, Body 5.1x4.5mm (max), Pitch 0.65mm, IPC Medium Density"
  rect 1.45x0.45 smd: 1(-2.95,1.95) 2(-2.95,1.3) 3(-2.95,0.65) 4(-2.95,0) 5(-2.95,-0.65) 6(-2.95,-1.3) 7(-2.95,-1.95) 8(2.95,-1.95) 9(2.95,-1.3) 10(2.95,-0.65) 11(2.95,0) 12(2.95,0.65) 13(2.95,1.3) 14(2.95,1.95)
  silkscreen extent -3.1,-2.55 1.85,2.73, body extent -3.12,-2.55 3.12,2.55, height 1.2
SOT23-5 [mil]
  rect 39x19.68 smd: 1(-51,37.5) 2(-51,0) 3(-51,-37.5) 4(51,-37.5) 5(51,37.5)
  silkscreen extent -21,-55 19,58, body extent -57,-59 56,60, height 48
SOT65P210X110-6N [mm] "SOT363, SC70-6, SOT, 0.65mm Pitch, 6 Pin, 1.25mm W X 2.00mm L X 1.10mm H, IPC Medium Density"
  rect 0.95x0.4 smd: 1(-1.1,0.65) 2(-1.1,0) 3(-1.1,-0.65) 4(1.1,-0.65) 5(1.1,0) 6(1.1,0.65)
  silkscreen extent -1.42,-1 0.3,1.47, body extent -1.2,-1.1 1.2,1.1, height 1.1
SOT95P240X110-3N [mm] "SOT23 3-Leads, Pitch 0.95mm, Body 1.3x2.9mm, IPC Medium Density"
  rect 1.05x0.65 smd: 1(-1.15,0.95) 2(-1.15,-0.95) 3(1.15,0)
  silkscreen extent -1.53,-1.45 0.3,1.92, body extent -1.25,-1.5 1.25,1.5, height 1.1
SOT95P240X130-3N [mm] "SOT23 3-Leads, Pitch 0.95mm - Body 1.3x2.9mm, IPC Medium Density"
  rect 1.05x0.65 smd: 1(-1.15,0.95) 2(-1.15,-0.95) 3(1.15,0)
  silkscreen extent -1.53,-1.45 0.3,1.92, body extent -1.25,-1.5 1.25,1.5, height 1.3
SOT95P284X122-5N [mm] "SOT23 5, Pitch 0.95mm - Body 1.67x2.99mm, IPC Medium Density"
  rect 1.1x0.6 smd: 1(-1.3,0.95) 2(-1.3,0) 3(-1.3,-0.95) 4(1.3,-0.95) 5(1.3,0.95)
  silkscreen extent -2.18,-1.5 0.35,1.85, body extent -1.44,-1.5 1.44,1.5, height 1.22
SOT230P700X180-4N [mm] "SOT223, 2.30mm pitch; 3 pin, 3.70mm W X 6.70mm L, IPC Medium Density"
  rect 2.15x0.95 smd: 1(-2.9,2.3) 2(-2.9,0) 3(-2.9,-2.3)
  rect 2.15x3.25 smd: 4(2.9,0)
  silkscreen extent -3.87,-3.35 1.45,3.48, body extent -3.65,-3.35 3.65,3.35, height 1.81
TO228P991X238-3N-R648X546 [mm] "TO-252AA DPAK TO, 2.28mm pitch; 2 pin,9.91mm L X 6.095mm W X 2.38mm H body, IPC Medium Density"
  rect 2.05x1.25 smd: 1(-4.55,2.28) 2(-4.55,-2.28)
  rect 7x5.55 smd: 3(2.05,0)
  silkscreen extent -5.42,-3.25 -1.8,3.57, body extent -5,-3.38 5.27,3.37, height 2.38
TYCO_RCT-0C [mm] "0805 (2012) Surface Mount PCB Test Point"
  rect 2.95x1.4 smd: 1(0,0)
  body extent -1,-0.62 1,0.63, height 1.45

## Part data
B2 B3: library part SMD_PAD_D1MM, "Pad", Author="CERN DEM JLC", Component Type="Standard (No BOM)", ComponentHeight=0mm, CreateDate=10.10.2017, Family="SMD Pad", HelpURL=Undefined, LatestRevisionDate=10.10.2017, Mounted=No, PackageDescription="1mm Diameter SMD Pad", Part Description="1mm Diameter SMD Pad", Part Number=SMD_PAD_D1MM, Pin Count=1, Sense=No, SMD=Yes, Socket=No, Status=None
C1 C2 C3 C4 C5 C9 C10 C11 C12 C13 C14 C16 C17 C18 C21 C23 C26 C29 C39 C42 C48: library part CC0603_100NF_50V_10%_X5R, "Non-polarised capacitor", Case=0603, Manufacturer=GENERIC, Manufacturer1 ComponentHeight=0.9mm, Manufacturer1 Example=TDK, Manufacturer1 Part Number=C1608X5R1H104K080, Tolerance=±10%, Voltage=50V, Author="CERN DEM MR", Component Type=Standard, CreateDate=08.01.2016, HelpURL=\\cern.ch\dfs\Applications\Altium\Datasheets\CC0603_X5R_TDK_C.pdf, LatestRevisionDate=08.01.2016, Manufacturer Part Number=CC0603_100NF_50V_10%_X5R, Mounted=Yes, Part Description="SMD Multilayer Chip Ceramic Capacitor", Part Number=CC0603_100NF_50V_10%_X5R, Pin Count=2, Sense=No, SMD=Yes, Socket=No, Status=None, TC=X5R
C6 C7 C22 C30 C49: library part CC0805_22UF_25V_20%_X5R, "Non-polarised capacitor", Case=0805, Manufacturer=GENERIC, Manufacturer1 ComponentHeight=1.45mm, Manufacturer1 Example=MURATA, Manufacturer1 Part Number=GRM21BR61E226ME44, Tolerance=±20%, Voltage=25V, Author="CERN DEM WB", Component Type=Standard, ComponentHeight=1.45mm, CreateDate=08.10.2021, HelpURL=\\cern.ch\dfs\Applications\Altium\Datasheets\CC0805_MURATA_GRM21BR61E226ME44.pdf, LatestRevisionDate=08.10.2021, Manufacturer Part Number=CC0805_22UF_25V_20%_X5R, Mounted=Yes, Part Description="Chip Multilayer Ceramic Capacitor for General Purpose", Part Number=CC0805_22UF_25V_20%_X5R, Pin Count=2, Sense=No, SMD=Yes, Socket=No, Status=Preferred, TC=X5R
C8: library part CAE430-540_10UF_16V_20%, "Polarised capacitor", Case=B, Manufacturer=PANASONIC, Manufacturer Part Number=EEEFK1C100AR, Tolerance=±20%, Voltage=16V, Author="CERN DEM JLC", Component Type=Standard, ComponentHeight=5.8mm, CreateDate=03.12.2007, HelpURL=\\cern.ch\dfs\Applications\Altium\Datasheets\CAE_PANASONIC_FK-V.pdf, LatestRevisionDate=05.11.2014, Mounted=Yes, Part Description="Aluminum Electrolytic SMT Capacitor", Part Number=CAE430-540_10UF_16V_20%, Pin Count=2, Sense=No, SMD=Yes, Socket=No, Status="Not Recommended"
C15: library part "CC1812_100NF_1000V_10%_X7R_KEMET_HV FT-CAP", "Non-polarised capacitor", Case=1812, Manufacturer=KEMET, Manufacturer Part Number=C1812X104KDRACTU, Tolerance=±10%, Voltage=1000V, Author="CERN DEM MR", Component Type=Standard, ComponentHeight=1.85mm, CreateDate=20.04.2017, HelpURL="\\cern.ch\dfs\Applications\Altium\Datasheets\CC1812_X7R_KEMET_HV FT-CAP.pdf", LatestRevisionDate=20.04.2017, Mounted=Yes, Part Description="High Voltage Flexible Termination System (HV FT-CAP) SMD Multilayer Ceramic  Chip Capacitor", Part Number="CC1812_100NF_1000V_10%_X7R_KEMET_HV FT-CAP", Pin Count=2, Sense=No, SMD=Yes, Socket=No, Status=None, TC=X7R
C19 C20 C27: library part CC0603_2.2UF_16V_10%_X5R, "Non-polarised capacitor", Case=0603, Manufacturer=GENERIC, Manufacturer1 ComponentHeight=0.9mm, Manufacturer1 Example="YAGEO PHYCOMP", Manufacturer1 Part Number=CC0603KRX5R7BB225, Tolerance=±10%, Voltage=16V, Author="CERN DEM JLC", Component Type=Standard, CreateDate=28.04.2011, HelpURL=\\cern.ch\dfs\Applications\Altium\Datasheets\CC0805_X5R_PHYCOMP_HC.pdf, LatestRevisionDate=28.04.2011, Manufacturer Part Number=CC0603_2.2UF_16V_10%_X5R, Mounted=Yes, Part Description="SMD Multilayer Chip Ceramic Capacitor", Part Number=CC0603_2.2UF_16V_10%_X5R, Pin Count=2, Sense=No, SMD=Yes, Socket=No, Status=Preferred, TC=X5R
C24: library part CC0603_1UF_25V_10%_X7R, "Non-polarised capacitor", Case=0603, Manufacturer=GENERIC, Manufacturer1 ComponentHeight=0.9mm, Manufacturer1 Example=MURATA, Manufacturer1 Part Number=GRM188R71E105KA12D, Tolerance=±10%, Voltage=25V, Author="CERN DEM JLC", Component Type=Standard, CreateDate=18/01/2011, HelpURL=\\cern.ch\dfs\Applications\Altium\Datasheets\CC0603_X7R_MURATA.pdf, LatestRevisionDate=18/01/2011, Manufacturer Part Number=CC0603_1UF_25V_10%_X7R, Mounted=Yes, Part Description="SMD Multilayer Chip Ceramic Capacitor", Part Number=CC0603_1UF_25V_10%_X7R, Pin Count=2, Sense=No, SMD=Yes, Socket=No, Status=None, TC=X7R
C25: library part CC0603_82PF_50V_5%_NP0, "Non-polarised capacitor", Case=0603, Manufacturer=GENERIC, Manufacturer1 ComponentHeight=0.87mm, Manufacturer1 Example=PHYCOMP, Manufacturer1 Part Number=223886715829, Tolerance=±5%, Voltage=50V, Author="CERN DEM JLC", Component Type=Standard, CreateDate=03.12.2007, HelpURL=\\cern.ch\dfs\Applications\Altium\Datasheets\CC0603_NP0_PHYCOMP.pdf, LatestRevisionDate=03.12.2007, Manufacturer Part Number=CC0603_82PF_50V_5%_NP0, Mounted=Yes, Part Description="SMD Multilayer Chip Ceramic Capacitor", Part Number=CC0603_82PF_50V_5%_NP0, Pin Count=2, Sense=No, SMD=Yes, Socket=No, Status=Preferred, TC=C0G/NP0
C28: library part CC1210_4.7UF_50V_10%_X7R, "Non-polarised capacitor", Case=1210, Manufacturer=GENERIC, Manufacturer1 ComponentHeight=2.7mm, Manufacturer1 Example=KEMET, Manufacturer1 Part Number=C1210C475K5RAC, Tolerance=±10%, Voltage=50V, Author="CERN DEM JLC", Component Type=Standard, CreateDate=01.04.2009, HelpURL=\\cern.ch\dfs\Applications\Altium\Datasheets\CC1210_X7R_KEMET.pdf, LatestRevisionDate=05.05.2009, Manufacturer Part Number=CC1210_4.7UF_50V_10%_X7R, Mounted=Yes, Part Description="SMD Multilayer Chip Ceramic Capacitor", Part Number=CC1210_4.7UF_50V_10%_X7R, Pin Count=2, Sense=No, SMD=Yes, Socket=No, Status=None, TC=X7R
D1 D2 D3 D4: "Serial Diode", Case=SOT23-3, Manufacturer="NXP SEMICONDUCTORS", Power=250mW, Voltage=75V, Author="CERN DEM JMW", Bonding=No, Component Type=Standard, ComponentHeight=1.1mm, CreateDate=21.11.2008, Device=BAV199, HelpURL=\\cern.ch\dfs\Applications\Altium\Datasheets\BAV199.pdf, LatestRevisionDate=21.11.2008, Manufacturer Part Number=BAV199, Mounted=Yes, PackageDescription="SOT, 0.95mm Pitch; 3 Pin, 1.40mm W X 3.00mm L X 1.10mm H body, IPC Medium Density", Part Description="Low-Leakage Double Diode", Part Number=BAV199, Pin Count=3, PressFit=No, Sense=No, SMD=Yes, Socket=No
D5 D10 D20 D21 D22 D23: "Diode", Case=SOD123F, Manufacturer="DIODES INCORPORATED", Power=1A, Voltage=1000V, Author="CERN DEM HF", Bonding=No, Component Type=Standard, ComponentHeight=1.15mm, CreateDate=29.02.2024, Device=RS1MWF, HelpURL=\\cern.ch\dfs\Applications\Altium\Datasheets\RS1MWF.pdf, LatestRevisionDate=29.02.2024, Manufacturer Part Number=RS1MWF, Mounted=Yes, PackageDescription="SODF (SOD-123F) Diode; 1.80mm W X 0.3.50mm L X 1.15mm H body, IPC Medium Density", Part Description="High Voltage Fast Recover Rectifier", Part Number=RS1MWF, Pin Count=2, PressFit=No, Sense=No, SMD=Yes, Socket=No
D6 D16: "Dual Common Cathode Schottky Diodes", Case=SOT23-3, Manufacturer="FAIRCHILD SEMICONDUCTOR", Power=200mA, Voltage=30V, Author="CERN DEM JLC", Bonding=No, Component Type=Standard, ComponentHeight=1.30mm, CreateDate=17.09.2009, Device=BAT54C, HelpURL=\\cern.ch\dfs\Applications\Altium\Datasheets\BAT54C.pdf, LatestRevisionDate=27.05.2010, Manufacturer Part Number=BAT54C, Mounted=Yes, PackageDescription="SOT23 3-Leads, Pitch 0.95mm - Body 1.3x2.9mm, IPC Medium Density", Part Description="Dual Common Cathode Small Signal Schottky Diode", Part Number=BAT54C, Pin Count=3, PressFit=No, Sense=No, SMD=Yes, Socket=No
D7: "Diode", Case=SOD-80C, Manufacturer="NXP SEMICONDUCTORS", Power=200mA, Voltage=75V, Author="CERN DEM JLC", Bonding=No, Component Type=Standard, ComponentHeight=1.6mm, CreateDate=30.03.2009, Device=PMLL4148L, HelpURL=\\cern.ch\dfs\Applications\Altium\Datasheets\PMLL4148L.pdf, LatestRevisionDate=09.12.2009, Manufacturer Part Number=PMLL4148L, Mounted=Yes, PackageDescription="SOD80C, MELF Diode, 2-Leads, Body 3.5x1.5mm, IPC Medium Density", Part Description="High-speed switching diodes", Part Number=PMLL4148L, Pin Count=2, PressFit=No, Sense=No, SMD=Yes, Socket=No
D8 D17: "Schottky Diode", Case=SOD-123, Manufacturer="ON SEMICONDUCTOR", Manufacturer Part Number=MBR0540, Power=500mA, Voltage=40V, Author="CERN DEM JLC", Bonding=No, Component Type=Standard, ComponentHeight=1.35mm, CreateDate=11.04.2011, Device=MBR0540T1G, HelpURL=\\cern.ch\dfs\Applications\Altium\Datasheets\MBR0540T1G.pdf, LatestRevisionDate=24.05.2022, Mounted=Yes, PackageDescription="Diode (SOD-123), 2.70mm W X 1.60mm L X 1.35mm H body, IPC Medium Density", Part Description="Schottky Power Rectifier", Part Number=MBR0540T1G, Pin Count=2, PressFit=No, Sense=No, SMD=Yes, Socket=No
D9: "Zener Diode", Case=DO-214AC, Manufacturer="VISHAY SEMICONDUCTORS", Power=1.25W, Voltage=36V, Author="CERN DEM JLC", Bonding=No, Component Type=Standard, ComponentHeight=2.3mm, CreateDate=02.06.2008, Device=BZG03C36, HelpURL=\\cern.ch\dfs\Applications\Altium\Datasheets\BZG03C.pdf, LatestRevisionDate=02.06.2008, Manufacturer Part Number=BZG03C36, Mounted=Yes, PackageDescription="DO-214-AC/SMA Molded Diode, Body 5.3x2.6mm, IPC Medium Density", Part Description="Voltage Regulator Diode", Part Number=BZG03C36, Pin Count=2, PressFit=No, Sense=No, SMD=Yes, Socket=No
D11: "Transient Voltage Suppressor Diode (Uni-Directional)", Case=DO-216AA, Manufacturer="ST MICROELECTRONICS", Power=200W, Voltage=3V3, Author="CERN DEM BR", Bonding=No, Component Type=Standard, ComponentHeight=1.15mm, CreateDate=27.06.2019, Device=SM2T3V3A, HelpURL=\\cern.ch\dfs\Applications\Altium\Datasheets\SM2T3V3A.pdf, LatestRevisionDate=27.06.2019, Manufacturer Part Number=SM2T3V3A, Mounted=Yes, PackageDescription="DO-216-AA/SMB Molded Diode, Body 1.9x1.9mm, IPC Medium Density", Part Description="Low voltage Unidirectional Transil™ Diode", Part Number=SM2T3V3A, Pin Count=2, PressFit=No, Sense=No, SMD=Yes, Socket=No
D12 D13 D14 D15: "Transient Voltage Suppressor Diode (Uni-Directional)", Case=DO-214AC, Manufacturer=BOURNS, Power=400W, Voltage=5V, Author="CERN DEM MR", Bonding=No, Component Type=Standard, ComponentHeight=2.62mm, CreateDate=14.07.2016, Device=SMAJ5.0A, HelpURL=\\cern.ch\dfs\Applications\Altium\Datasheets\SMAJ5.0A.pdf, LatestRevisionDate=14.07.2016, Manufacturer Part Number=SMAJ5.0A, Mounted=Yes, PackageDescription="DO-214-AC/SMA Diode, Molded Body; 5.21mm L X 2.605mm W X 2.62mm H, IPC Medium Density", Part Description="Surface Mount Uni-directional Transient Voltage Suppressor Diode", Part Number=SMAJ5.0A, Pin Count=2, PressFit=No, Sense=No, SMD=Yes, Socket=No
D24 D26: "Transient Voltage Suppressor Diode (Uni-Directional)", Case=DO-214AB, Manufacturer=LITTELFUSE, Power=1500W, Voltage=480V, Author="CERN DEM HF", Bonding=No, Component Type=Standard, ComponentHeight=2.62mm, CreateDate=05.12.2022, Device=1.5SMC480A, HelpURL=\\cern.ch\dfs\Applications\Altium\Datasheets\1.5SMC.pdf, LatestRevisionDate=05.12.2022, Manufacturer Part Number=1.5SMC480A, Mounted=Yes, PackageDescription="DO-214-AB/SMC Molded Diode, Body 7.9x5.9mm, IPC Medium Density", Part Description="Uni-Directional Transient Voltage Suppressor Diode", Part Number=1.5SMC480A, Pin Count=2, PressFit=No, Sense=No, SMD=Yes, Socket=No
IC1: library part OA_LMV324_TSSOP, "Quad Operational Amplifier", Case=TSSOP14, Manufacturer="TEXAS INSTRUMENTS", Author=GK, Bonding=No, Component Type=Standard, ComponentHeight=1.80mm, CreateDate=2011-08-24, Device=LMV324IPT, HelpURL=\\cern.ch\dfs\Applications\Altium\Datasheets\LMV324ID.pdf, LatestRevisionDate=2011-08-24, Manufacturer Part Number=LMV324IPT, Mounted=Yes, PackageDescription="TSSOP 14, Pitch 0.65 mm - Body 5x86.4mm, IPC Medium Density", Part Description="Quad Low-Voltage Rail-To-Rail Output Operational Amplifier", Part Number=LMV324IPT, Pin Count=14, PressFit=No, SMD=Yes, Socket=No, Table="Operational Amplifiers"
IC2 IC7: "Ultra-Small, Low-Power, 16-Bit Analog-to-Digital Converter with Internal Reference", Case=MSOP10, Manufacturer="TEXAS INSTRUMENTS", Manufacturer Part Number=ADS1115IDGS, Author="CERN DEM JLC", Bonding=No, Component Type=Standard, ComponentHeight=1.1mm, CreateDate=29.10.2012, Device=ADS1115IDGST, HelpURL=\\cern.ch\dfs\Applications\Altium\Datasheets\ADS1115IDGST.pdf, LatestRevisionDate=13.06.2022, Mounted=Yes, PackageDescription="SOP, 0.50mm Pitch; 10 Pin, 3.00mm W X 3.00mm L X 1.10mm H body, IPC Medium Density", Part Description="Ultra-Small, Low-Power, 4 Channels 16-Bit Analog-to-Digital Converter with Internal Reference", Part Number=ADS1115IDGST, Pin Count=10, PressFit=No, Sense=No, SMD=Yes, Socket=No
IC4: library part OPTOMOS_AQV224NS, "PhotoMOS Relay 400V 40mA", Case=SOP6, Manufacturer=PANASONIC, Author=GK, Bonding=No, Component Type=Standard, ComponentHeight=2.3mm, ComponentLink1Description="Package Drawing", ComponentLink1URL=\\cern.ch\dfs\Applications\Altium\Datasheets\AQV21_Package-Drawing.pdf, CreateDate=03.09.2010, Device=AQV224NS, HelpURL=\\cern.ch\dfs\Applications\Altium\Datasheets\AQV212S.pdf, LatestRevisionDate=04.12.2018, Manufacturer Part Number=AQV224NS, Mounted=Yes, PackageDescription="PANASONIC Serie AQV21(SOP), 2.54mm Pitch; 6 Pin, 4.40mm W X 6.30mm L X 2.30mm H body", Part Description="GU SOP 1 Form A, PhotoMOS Relay, 400V 40mA", Part Number=AQV224NS, Pin Count=6, PressFit=No, Sense=No, SMD=Yes, Socket=No
IC5: "RECOM, RP Series, Single Output DCDC Converter", Manufacturer=RECOM, Author="CERN DEM HF", Bonding=No, Component Type=Standard, ComponentHeight=10.50mm, CreateDate=23.05.2023, Device=RHV3-0505S/R20, HelpURL=\\cern.ch\dfs\Applications\Altium\Datasheets\RHV3.pdf, LatestRevisionDate=23.05.2023, Manufacturer Part Number=RHV3-0505S/R20, Mounted=Yes, PackageDescription="RHV3 Series, Body 45x15mm, SIP16 Package", Part Description="5VDC to +5VDC (600mA), 3W  Unregulated DC-DC Converter", Part Number=RHV3-0505S/R20, Pin Count=4, PressFit=No, Sense=No, SMD=No, Socket=No
IC6: "3-Terminal Regulator 1=Adj 2=OUT 3=IN 4=OUT", Case=SOT223, Manufacturer="ST MICROELECTRONICS", Author="CERN DEM MR", Bonding=No, Component Type=Standard, ComponentHeight=1.8mm, CreateDate=14.07.2016, Device=LD1117STR, HelpURL=\\cern.ch\dfs\Applications\Altium\Datasheets\LD1117STR.pdf, LatestRevisionDate=14.07.2016, Manufacturer Part Number=LD1117STR, Mounted=Yes, PackageDescription="SOT223, 2.30mm Pitch; 4 Pin, 3.70mm W X 6.70mm L X 1.80mm H body, IPC Medium Density", Part Description="1.25V To 15V Adjustable, 800mA Low-Dropout Positive Voltage Regulator", Part Number=LD1117STR, Pin Count=4, PressFit=No, Sense=No, SMD=Yes, Socket=No
IC8: "Quad Operational Amplifier", Case=SOIC14, Manufacturer="FAIRCHILD SEMICONDUCTOR", Manufacturer Part Number=LM324M, Author="CERN DEM JLC", Bonding=No, Component Type=Standard, ComponentHeight=1.80mm, CreateDate=13.04.2010, Device=LM324M/NOPB, HelpURL=\\cern.ch\dfs\Applications\Altium\Datasheets\LM324M-NOPB.pdf, LatestRevisionDate=02.06.2022, Mounted=Yes, PackageDescription="SOIC 14, Pitch 1.27mm - Body 4x8.75mm, IPC Medium Density", Part Description="Quad Operational Amplifier", Part Number=LM324M/NOPB, Pin Count=14, PressFit=No, Sense=No, SMD=Yes, Socket=No
IC10: library part NCV8730ASNADJT1G, "LDO Regulator, 150 mA, / 38V", Manufacturer=Onsemi, Manufacturer Part Number=NCV8730ASNADJT1G
IC11: "8-Bit Single, +36V (±18V) Digital POT with SPI /100kOhm (-40°C to 125°C)", Case=TSSOP14, Manufacturer="MICROCHIP TECHNOLOGY", Author=GK, Bonding=No, Component Type=Standard, ComponentHeight=1.2mm, CreateDate=28.02.2024, Device=MCP41HV51T-104E, HelpURL=\\cern.ch\dfs\Applications\Altium\Datasheets\MCP45HVX1.pdf, LatestRevisionDate=28.02.2024, Manufacturer Part Number=MCP41HV51T-104E, Mounted=Yes, PackageDescription="SOP, 14-Leads, Body 5.1x4.5mm (max), Pitch 0.65mm, IPC Medium Density", Part Description="8-Bit Single, +36V (±18V) Digital POT with SPI /100kOhm (-40°C to 125°C)", Part Number=MCP41HV51T-104E, Pin Count=14, PressFit=No, Sense=No, SMD=Yes, Socket=No
IC12: library part PM_LM2733YMF, "0.6/1.6 MHz Boost Converters With 40V Internal FET Switch in SOT-23", Case=SOT23-5, Manufacturer="TEXAS INSTRUMENTS", Author=GK, Bonding=No, Component Type=Standard, ComponentHeight=1.22mm, CreateDate=06.04.2009, Device=LM2733YMF, HelpURL=\\cern.ch\dfs\Applications\Altium\Datasheets\LM2733XMF.pdf, LatestRevisionDate=16.09.2014, Manufacturer Part Number=LM2733YMF, Mounted=Yes, PackageDescription="SOT23, 0.95mm Pitch; 5 Pin, 1.67mm W X 2.99mm L X 1.22mm H body, IPC Medium Density", Part Description="0.6 MHz Boost Converters with 40V Internal FET Switch in SOT-23", Part Number=LM2733YMF, Pin Count=5, PressFit=No, Sense=No, SMD=Yes, Socket=No
J1: library part SAMTEC_TSW-107-07-L-S-LL, "Connector 7 Male", Manufacturer=SAMTEC, Manufacturer Part Number=TSW-107-07-L-S-LL, Author="CERN DEM MR", Component Type=Standard, ComponentHeight=8.38mm, CreateDate=07.12.2016, Family="Header 7", HelpURL=\\cern.ch\dfs\Applications\Altium\Datasheets\SAMTEC_TSW-107-07-L-S-LL.pdf, LatestRevisionDate=07.12.2016, Mounted=Yes, Part Description="7 Contacts, Pitch 2.54mm, Single Row  Through Mount Straigh Header (Post Lead 5.84mm, Tail Lead 2.54mm, Insulator 2.54mm)", Part Number=SAMTEC_TSW-107-07-L-S-LL, Pin Count=7, PressFit=No, Sense=No, SMD=No, Socket=No, Status=None
L1: library part IND_10UH_20%_TDK_VLCF5020-1, "Inductor With Core", Manufacturer=TDK, Manufacturer Part Number=VLCF5020T-100M1R1-1, Power=1.5A, Resistance=0.198R, Tolerance=±20%, Author="CERN DEM JLC", Component Type=Standard, ComponentHeight=2mm, CreateDate=10.07.2014, HelpURL=\\cern.ch\dfs\Applications\Altium\Datasheets\IND_TDK_VLCF.pdf, LatestRevisionDate=10.07.2014, Mounted=Yes, Part Description="SMD Inductor for Power Circuits (Wound/STD , Magnetic Shielded), VLCF series", Part Number=IND_10UH_20%_TDK_VLCF5020-1, Pin Count=2, Sense=No, SMD=Yes, Socket=No
LD1 LD2 LD3: library part LED_KINGBRIGHT_KP-1608CGCK, "LED Green 1C 2A", Case=0603, Manufacturer=KINGBRIGHT, Manufacturer Part Number=KP-1608CGCK, Author="CERN DEM HF", Bonding=No, Color=Green, Component Type=Standard, ComponentHeight=1.1mm, CreateDate=01.10.2021, HelpURL=\\cern.ch\dfs\Applications\Altium\Datasheets\LED_KINGBRIGHT_KP-1608CGCK.pdf, LatestRevisionDate=01.10.2021, Mounted=Yes, PackageDescription="SMT Green LED, Case 0603, Body L 1.60mm x W 0.80mm x H 1.10mm", Part Description="1.6x0.8mm SMD Chip Green LED Lamp", Part Number=LED_KINGBRIGHT_KP-1608CGCK, Pin Count=2, PressFit=No, Sense=No, SMD=Yes, Socket=No
P1: "WR-PHD Pin Header, THT, pitch 2.54mm, Single Row, Angled, 32p", Contact Resistance=20mOhm, Manufacturer="Wurth Elektronik", Operating Temperature="-40 to +105degC", Rated Current=3A, Withstanding Voltage=500VAC, Working Voltage=250VAC, ComponentLink1Description=Manufacturer, ComponentLink1URL=http://www.we-online.de, ComponentLink2Description=Datasheet, ComponentLink2URL=https://www.we-online.com/catalog/datasheet/61303211021.pdf, Gender="Pin Header", Manufacturer Part Number=61303211021, Mounting Technology=THT, Orientation=Angled, Packaging=Bag, Pin Number=32, Pitch=2.54mm, Row Number=Single
PCBM1: library part PCBM_ESP32-WROVER-I, "Generic WiFi-BT-BLE MCU Module", Manufacturer=ESPRESSIF, Author="CERN DEM JLC", Bonding=No, Component Type=Standard, ComponentHeight=3.65mm, CreateDate=14.11.2017, Device=ESP32-WROVER-I, HelpURL=\\cern.ch\dfs\Applications\Altium\Datasheets\PCBM_ESP32-WROVER-I.pdf, LatestRevisionDate=14.11.2017, Manufacturer Part Number=ESP32-WROVER-I, Mounted=Yes, PackageDescription="Generic WiFi-BT-BLE MCU Module (IPEX antenna) ,Body 18.00mm x 31.4mm", Part Description="Generic WiFi-BT-BLE MCU Module (IPEX antenna, 32-Mbit PSRAM)", Part Number=PCBM_ESP32-WROVER-I, Pin Count=39, PressFit=No, Sense=No, SMD=Yes, Socket=No
R1 R2 R4 R6 R14 R17 R18 R19 R20 R26 R27 R31 R32 R49 R50 R51 R52 R60: library part R0603_10K_1%_0.1W_100PPM, "Resistor - 1%", Case=0603, Manufacturer=GENERIC, Manufacturer1 ComponentHeight=0.55mm, Manufacturer1 Example="NIC COMPONENT", Manufacturer1 Part Number=NRC06F1002TRF, Power=0.1W, Tolerance=±1%, Author="CERN DEM JLC", Component Type=Standard, CreateDate=03.12.2007, HelpURL=\\cern.ch\dfs\Applications\Altium\Datasheets\R0603_NIC_NRC.pdf, LatestRevisionDate=13.03.2008, Manufacturer Part Number=R0603_10K_1%_0.1W_100PPM, Mounted=Yes, Part Description="General Purpose Thick Film Chip Resistor", Part Number=R0603_10K_1%_0.1W_100PPM, Pin Count=2, PressFit=No, Sense=No, SMD=Yes, Socket=No, Status=Preferred, TC=±100ppm/°C
R3: library part R2010_1G_1%_0.5W_100PPM_VISHAY_CRHV2010AF1G00FKET, "Resistor - 1%", Case=2010, Manufacturer="VISHAY TECHNO", Power=0.5W, Tolerance=±1%, Author="CERN DEM JLC", Component Type=Standard, ComponentHeight=0.68mm, CreateDate=03.06.2015, HelpURL=\\cern.ch\dfs\Applications\Altium\Datasheets\R2010_VISHAY_CRHV.pdf, LatestRevisionDate=03.06.2015, Manufacturer Part Number=Undefined, Mounted=Yes, Part Description=Undefined, Part Number=Undefined, Pin Count=2, PressFit=No, Sense=No, SMD=Yes, Socket=No, Status=None, TC=±100ppm/°C
R5 R33 R38: library part R0402_220R_1%_0.0625W_100PPM, "Resistor - 1%", Case=0402, Manufacturer=GENERIC, Manufacturer1 ComponentHeight=0.4mm, Manufacturer1 Example="YAGEO PHYCOMP", Manufacturer1 Part Number=232270672201L, Power=0.0625W, Tolerance=±1%, Author="CERN DEM JLC", Component Type=Standard, CreateDate=03.12.2007, HelpURL=\\cern.ch\dfs\Applications\Altium\Datasheets\R0402_Phycomp_RC0402.pdf, LatestRevisionDate=17.10.2012, Manufacturer Part Number=R0402_220R_1%_0.0625W_100PPM, Mounted=Yes, Part Description="General Purpose Thick Film Chip Resistor", Part Number=R0402_220R_1%_0.0625W_100PPM, Pin Count=2, PressFit=No, Sense=No, SMD=Yes, Socket=No, Status="Not Recommended", TC=±100ppm/°C
R7 R8 R10 R28: library part R0805_5K6_1%_0.125W_100PPM, "Resistor - 1%", Case=0805, Manufacturer=GENERIC, Manufacturer1 ComponentHeight=0.6mm, Manufacturer1 Example="NIC COMPONENT", Manufacturer1 Part Number=NRC10F5601TRF, Power=0.125W, Tolerance=±1%, Author="CERN DEM JLC", Component Type=Standard, CreateDate=03.12.2007, HelpURL=\\cern.ch\dfs\Applications\Altium\Datasheets\R0805_NIC_NRC.pdf, LatestRevisionDate=13.03.2008, Manufacturer Part Number=R0805_5K6_1%_0.125W_100PPM, Mounted=Yes, Part Description="General Purpose Thick Film Chip Resistor", Part Number=R0805_5K6_1%_0.125W_100PPM, Pin Count=2, PressFit=No, Sense=No, SMD=Yes, Socket=No, Status=Preferred, TC=±100ppm/°C
R9 R11 R15 R29: library part R0603_100R_1%_0.1W_100PPM, "Resistor - 1%", Case=0603, Manufacturer=GENERIC, Manufacturer1 ComponentHeight=0.55mm, Manufacturer1 Example="NIC COMPONENT", Manufacturer1 Part Number=NRC06F4700TRF, Power=0.1W, Tolerance=±1%, Author="CERN DEM JLC", Component Type=Standard, CreateDate=03.12.2007, HelpURL=\\cern.ch\dfs\Applications\Altium\Datasheets\R0603_NIC_NRC.pdf, LatestRevisionDate=13.03.2008, Manufacturer Part Number=R0603_100R_1%_0.1W_100PPM, Mounted=Yes, Part Description="General Purpose Thick Film Chip Resistor", Part Number=R0603_100R_1%_0.1W_100PPM, Pin Count=2, PressFit=No, Sense=No, SMD=Yes, Socket=No, Status=Preferred, TC=±100ppm/°C
R12 R13 R30 R34 R35 R36 R37 R44 R45 R46 R47 R48 R53 R54 R55 R56 R57: library part R0402_1K_1%_0.0625W_100PPM, "Resistor - 1%", Case=0402, Manufacturer=GENERIC, Manufacturer1 ComponentHeight=0.4mm, Manufacturer1 Example="YAGEO PHYCOMP", Manufacturer1 Part Number=232270671002L, Power=0.0625W, Tolerance=±1%, Author="CERN DEM JLC", Component Type=Standard, CreateDate=03.12.2007, HelpURL=\\cern.ch\dfs\Applications\Altium\Datasheets\R0402_Phycomp_RC0402.pdf, LatestRevisionDate=17.10.2012, Manufacturer Part Number=R0402_1K_1%_0.0625W_100PPM, Mounted=Yes, Part Description="General Purpose Thick Film Chip Resistor", Part Number=R0402_1K_1%_0.0625W_100PPM, Pin Count=2, PressFit=No, Sense=No, SMD=Yes, Socket=No, Status="Not Recommended", TC=±100ppm/°C
R16 R23 R91 R92 R93: library part R0603_15K_1%_0.1W_100PPM, "Resistor - 1%", Case=0603, Manufacturer=GENERIC, Manufacturer1 ComponentHeight=0.55mm, Manufacturer1 Example="NIC COMPONENT", Manufacturer1 Part Number=NRC06F1502TRF, Power=0.1W, Tolerance=±1%, Author="CERN DEM JMW", Component Type=Standard, CreateDate=17.08.2015, HelpURL=\\cern.ch\dfs\Applications\Altium\Datasheets\R0603_NIC_NRC.pdf, LatestRevisionDate=17.08.2015, Manufacturer Part Number=R0603_15K_1%_0.1W_100PPM, Mounted=Yes, Part Description="General Purpose Thick Film Chip Resistor", Part Number=R0603_15K_1%_0.1W_100PPM, Pin Count=2, PressFit=No, Sense=No, SMD=Yes, Socket=No, Status=Preferred, TC=±100ppm/°C
R21 R22: library part R2010_10M_1%_0.5W_200PPM, "Resistor - 1%", Case=2010, Manufacturer=GENERIC, Manufacturer1 ComponentHeight=0.65mm, Manufacturer1 Example="TT WELWYN", Manufacturer1 Part Number=LHVC2010-10MFT4, Power=0.5W, Tolerance=±1%, Author="CERN DEM JLC", Component Type=Standard, CreateDate=26.02.2015, HelpURL=\\cern.ch\dfs\Applications\Altium\Datasheets\R2010_WELWYN_LHVC.pdf, LatestRevisionDate=26.02.2015, Manufacturer Part Number=R2010_10M_1%_0.5W_200PPM, Mounted=Yes, Part Description="Thick Film Chip Resistor", Part Number=R2010_10M_1%_0.5W_200PPM, Pin Count=2, PressFit=No, Sense=No, SMD=Yes, Socket=No, Status=None, TC=±200ppm/°C
R24: library part R0603_360R_1%_0.1W_100PPM, "Resistor - 1%", Case=0603, Manufacturer=GENERIC, Manufacturer1 ComponentHeight=0.55mm, Manufacturer1 Example="NIC COMPONENT", Manufacturer1 Part Number=NRC06F3600TRF, Power=0.1W, Tolerance=±1%, Author="CERN DEM JLC", Component Type=Standard, CreateDate=03.12.2007, HelpURL=\\cern.ch\dfs\Applications\Altium\Datasheets\R0603_NIC_NRC.pdf, LatestRevisionDate=13.03.2008, Manufacturer Part Number=R0603_360R_1%_0.1W_100PPM, Mounted=Yes, Part Description="General Purpose Thick Film Chip Resistor", Part Number=R0603_360R_1%_0.1W_100PPM, Pin Count=2, PressFit=No, Sense=No, SMD=Yes, Socket=No, Status=Preferred, TC=±100ppm/°C
R25: library part R0603_220R_1%_0.1W_100PPM, "Resistor - 1%", Case=0603, Manufacturer=GENERIC, Manufacturer1 ComponentHeight=0.55mm, Manufacturer1 Example="NIC COMPONENT", Manufacturer1 Part Number=NRC06F2200TRF, Power=0.1W, Tolerance=±1%, Author="CERN DEM JLC", Component Type=Standard, CreateDate=03.12.2007, HelpURL=\\cern.ch\dfs\Applications\Altium\Datasheets\R0603_NIC_NRC.pdf, LatestRevisionDate=13.03.2008, Manufacturer Part Number=R0603_220R_1%_0.1W_100PPM, Mounted=Yes, Part Description="General Purpose Thick Film Chip Resistor", Part Number=R0603_220R_1%_0.1W_100PPM, Pin Count=2, PressFit=No, Sense=No, SMD=Yes, Socket=No, Status=Preferred, TC=±100ppm/°C
R39 R40 R41 R42: library part R0402_10K_1%_0.0625W_100PPM, "Resistor - 1%", Case=0402, Manufacturer=GENERIC, Manufacturer1 ComponentHeight=0.4mm, Manufacturer1 Example="YAGEO PHYCOMP", Manufacturer1 Part Number=232270671003L, Power=0.0625W, Tolerance=±1%, Author="CERN DEM JLC", Component Type=Standard, CreateDate=2007-12-03, HelpURL=\\cern.ch\dfs\Applications\Altium\Datasheets\R0402_Phycomp_RC0402.pdf, LatestRevisionDate=2012-10-17, Manufacturer Part Number=R0402_10K_1%_0.0625W_100PPM, Mounted=Yes, Part Description="General Purpose Thick Film Chip Resistor", Part Number=R0402_10K_1%_0.0625W_100PPM, Pin Count=2, SMD=Yes, Socket=No, Status="Not recommended", Table="Resistors SMD", TC=±100ppm/°C